# EAGLE board test_layout (EAGLE 6.5.0)
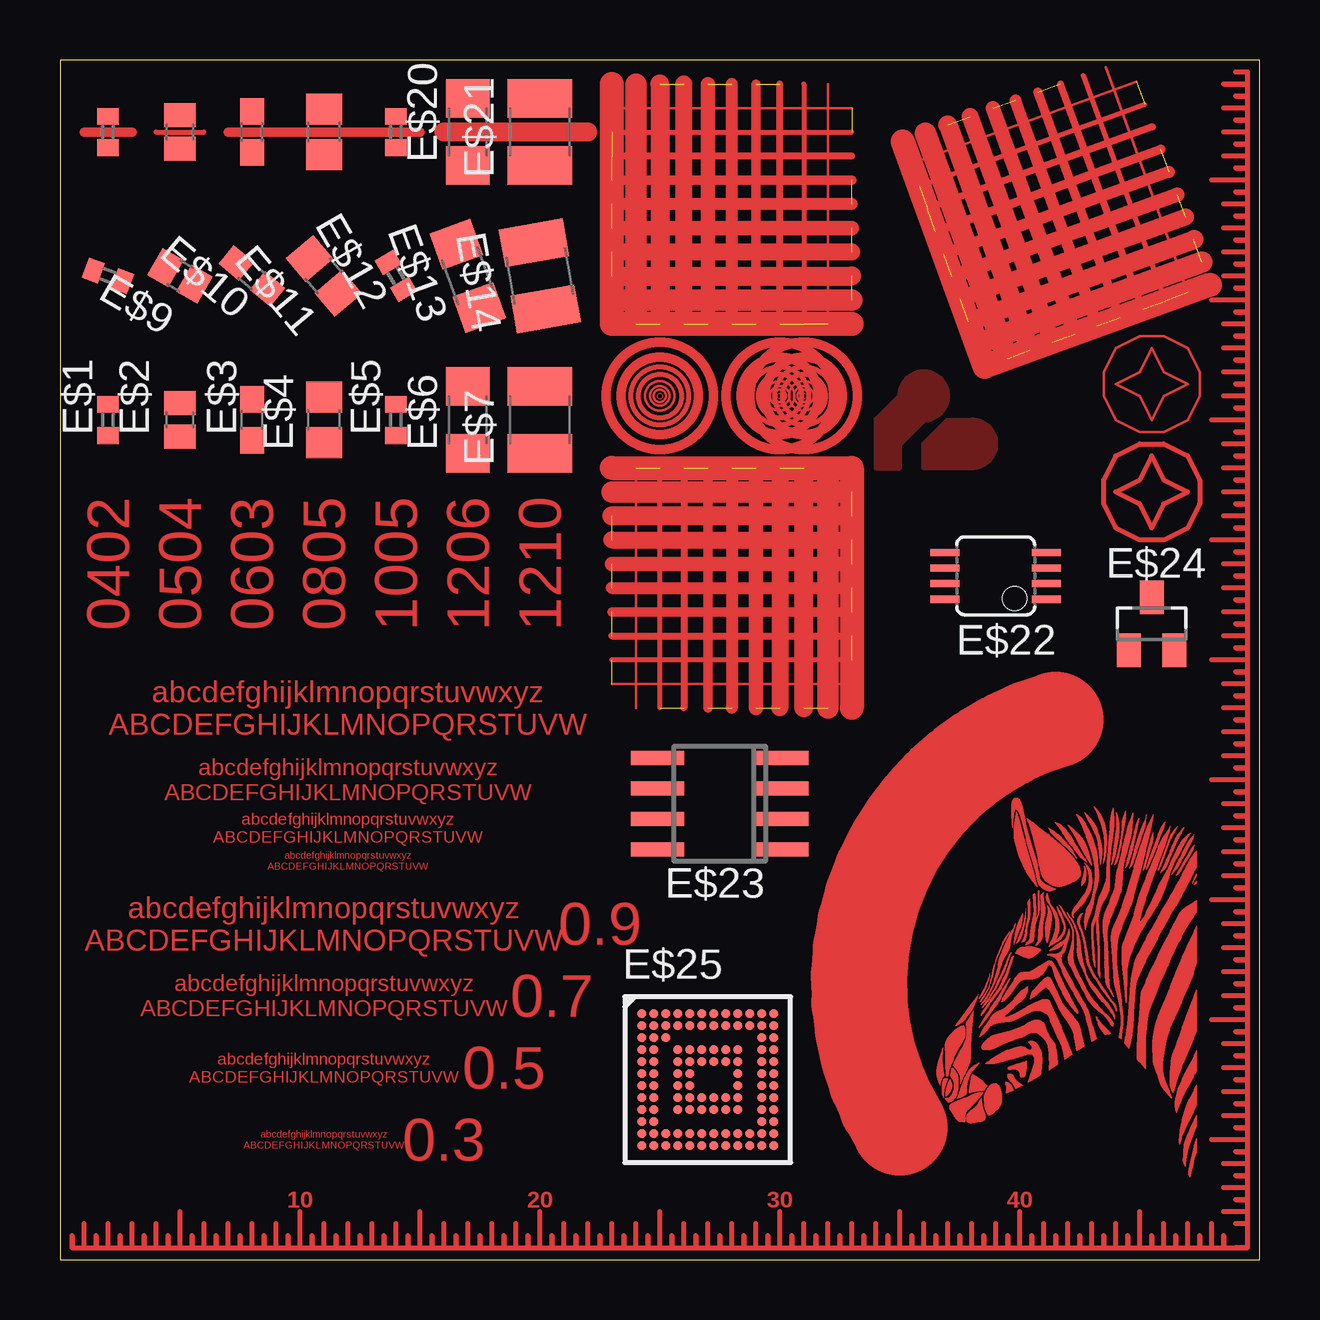
[diagram p0: board, top side]

Size 50 x 50 mm. Coordinates in mm from the lower left corner, seen from the top.
Outline: 0,0 50,0 50,50 0,50 0,0
Copper layers (1*16): Top 0.035mm / dielectric 1.5mm / Bottom 0.035mm
Design rules "default *": minimum track width 10mil, minimum drill 24mil, track to track 8mil, track to pad 8mil, pad to pad 8mil, via to via 8mil, smd to smd 8mil, copper to edge 0mil, drill to drill 0mil, minimum pad ring 10mil, minimum via ring 8mil, stop-mask expansion 4mil, vias tented up to drill 0mil, thermal gap 10mil

## Footprints (pad centres in the part's own frame; a part is rotated, then mirrored left to right if it is on the bottom)
C0402 = smd 0.7 x 0.9: 1 -0.65,0; 2 0.65,0
C0504 = smd 1 x 1.3: 1 -0.7,0; 2 0.7,0
C0603 = smd 1.1 x 1: 1 -0.85,0; 2 0.85,0
C0805 = smd 1.3 x 1.5: 1 -0.95,0; 2 0.95,0
C1005 = smd 0.7 x 0.9: 1 -0.65,0; 2 0.65,0
C1206 = smd 1.6 x 1.8: 1 -1.4,0; 2 1.4,0
C1210 = smd 1.6 x 2.7: 1 -1.4,0; 2 1.4,0
MSOP08 = smd 0.3 x 1.2: 1 -0.976,-2.113; 2 -0.326,-2.113; 3 0.324,-2.113; 4 0.974,-2.113; 5 0.974,2.112; 6 0.324,2.112; 7 -0.326,2.112; 8 -0.976,2.112
SO08 = smd 0.6 x 2.2: 1 -1.905,-2.6; 2 -0.635,-2.6; 3 0.635,-2.6; 4 1.905,-2.6; 5 1.905,2.6; 6 0.635,2.6; 7 -0.635,2.6; 8 -1.905,2.6
SOT23 = smd 1 x 1.4: 1 -0.95,-1.1; 2 0.95,-1.1; 3 0,1.1
S-PBGA-N113 = smd 0.35 x 0.35: A1 -2.75,2.75; A2 -2.25,2.75; A3 -1.75,2.75; A4 -1.25,2.75; A5 -0.75,2.75; A6 -0.25,2.75; A7 0.25,2.75; A8 0.75,2.75; A9 1.25,2.75; A10 1.75,2.75; A11 2.25,2.75; A12 2.75,2.75; B1 -2.75,2.25; B2 -2.25,2.25; B3 -1.75,2.25; B4 -1.25,2.25; B5 -0.75,2.25; B6 -0.25,2.25; B7 0.25,2.25; B8 0.75,2.25; B9 1.25,2.25; B10 1.75,2.25; B11 2.25,2.25; B12 2.75,2.25; C1 -2.75,1.75; C2 -2.25,1.75; C3 -1.75,1.75; C11 2.25,1.75; C12 2.75,1.75; D1 -2.75,1.25; D2 -2.25,1.25; D4 -1.25,1.25; D5 -0.75,1.25; D6 -0.25,1.25; D7 0.25,1.25; D8 0.75,1.25; D9 1.25,1.25; D11 2.25,1.25; D12 2.75,1.25; E1 -2.75,0.75; E2 -2.25,0.75; E4 -1.25,0.75; E5 -0.75,0.75; E6 -0.25,0.75; E7 0.25,0.75; E8 0.75,0.75; E9 1.25,0.75; E11 2.25,0.75; E12 2.75,0.75; F1 -2.75,0.25; F2 -2.25,0.25; F4 -1.25,0.25; F5 -0.75,0.25; F9 1.25,0.25; F11 2.25,0.25; F12 2.75,0.25; G1 -2.75,-0.25; G2 -2.25,-0.25; G4 -1.25,-0.25; G5 -0.75,-0.25; G9 1.25,-0.25; G11 2.25,-0.25; G12 2.75,-0.25; H1 -2.75,-0.75; H2 -2.25,-0.75; H4 -1.25,-0.75; H5 -0.75,-0.75; H6 -0.25,-0.75; H7 0.25,-0.75; H8 0.75,-0.75; H9 1.25,-0.75; H11 2.25,-0.75; H12 2.75,-0.75; J1 -2.75,-1.25; J2 -2.25,-1.25; J4 -1.25,-1.25; J5 -0.75,-1.25; J6 -0.25,-1.25; J7 0.25,-1.25; J8 0.75,-1.25; J9 1.25,-1.25; J11 2.25,-1.25; J12 2.75,-1.25; K1 -2.75,-1.75; K2 -2.25,-1.75; K11 2.25,-1.75; K12 2.75,-1.75; L1 -2.75,-2.25; L2 -2.25,-2.25; L3 -1.75,-2.25; L4 -1.25,-2.25; L5 -0.75,-2.25; L6 -0.25,-2.25; L7 0.25,-2.25; L8 0.75,-2.25; L9 1.25,-2.25; L10 1.75,-2.25; L11 2.25,-2.25; L12 2.75,-2.25; M1 -2.75,-2.75; M2 -2.25,-2.75; M3 -1.75,-2.75; M4 -1.25,-2.75; M5 -0.75,-2.75; M6 -0.25,-2.75; M7 0.25,-2.75; M8 0.75,-2.75; M9 1.25,-2.75; M10 1.75,-2.75; M11 2.25,-2.75; M12 2.75,-2.75

## Placement (x,y rotation side)
E$1  [C0402]  2,35 90 top
E$2  [C0504]  5,35 90 top
E$3  [C0603]  8,35 90 top
E$4  [C0805]  11,35 90 top
E$5  [C1005]  14,35 90 top
E$6  [C1206]  17,35 90 top
E$7  [C1210]  20,35 90 top
E$8  [C0402]  2,41 160 top
E$9  [C0504]  5,41 150 top
E$10  [C0603]  8,41 140 top
E$11  [C0805]  11,41 130 top
E$12  [C1005]  14,41 120 top
E$13  [C1206]  17,41 110 top
E$14  [C1210]  20,41 100 top
E$15  [C0402]  2,47 90 top
E$16  [C0504]  5,47 90 top
E$17  [C0603]  8,47 90 top
E$18  [C0805]  11,47 90 top
E$19  [C1005]  14,47 90 top
E$20  [C1206]  17,47 90 top
E$21  [C1210]  20,47 90 top
E$22  [MSOP08]  39,28.5 90 top
E$23  [SO08]  27.5,19 90 top
E$24  [SOT23]  45.5,26.5 0 top
E$25  [S-PBGA-N113]  27,7.5 0 top

## Library data of the parts
E$1-E$21 = rcl
E$22-E$24 = linear
E$25 = texas

## Tracks (layer width: path | path; a pad name or v marks a point on that pad's centre or on a via)
S$1
  Top 0.8: 22,47 16,47
S$2
  Top 0.4: 15,47 7,47
S$3
  Top 0.4: 1,47 3,47
S$4
  Top 0.2: 4,47 6,47
S$5
  Top 1: 23,39 23,49
S$6  (8 unrouted)
  Top 0.1: 32,39 32,49
  Top 0.2: 31,49 31,39
  Top 0.3: 30,39 30,49
  Top 0.4: 29,49 29,39
  Top 0.5: 28,39 28,49
  Top 0.6: 27,49 27,39
  Top 0.7: 26,39 26,49
  Top 0.8: 25,49 25,39
  Top 0.9: 24,39 24,49
S$7
  Top 1: 33,39 23,39
S$8  (8 unrouted)
  Top 0.1: 33,48 23,48
  Top 0.2: 23,47 33,47
  Top 0.3: 33,46 23,46
  Top 0.4: 23,45 33,45
  Top 0.5: 33,44 23,44
  Top 0.6: 23,43 33,43
  Top 0.7: 33,42 23,42
  Top 0.8: 23,41 33,41
  Top 0.9: 33,40 23,40
S$9
  Top 1: 33,33 33,23
S$10  (8 unrouted)
  Top 0.1: 24,33 24,23
  Top 0.2: 25,23 25,33
  Top 0.3: 26,33 26,23
  Top 0.4: 27,23 27,33
  Top 0.5: 28,33 28,23
  Top 0.6: 29,23 29,33
  Top 0.7: 30,33 30,23
  Top 0.8: 31,23 31,33
  Top 0.9: 32,33 32,23
S$11
  Top 1: 23,33 33,33
S$12  (8 unrouted)
  Top 0.1: 23,24 33,24
  Top 0.2: 33,25 23,25
  Top 0.3: 23,26 33,26
  Top 0.4: 33,27 23,27
  Top 0.5: 23,28 33,28
  Top 0.6: 33,29 23,29
  Top 0.7: 23,30 33,30
  Top 0.8: 33,31 23,31
  Top 0.9: 23,32 33,32
S$13
  Top 1: 38.55,37.22 35.13,46.61
S$14  (8 unrouted)
  Top 0.1: 47.01,40.29 43.59,49.69
  Top 0.2: 42.65,49.35 46.07,39.95
  Top 0.3: 45.13,39.61 41.71,49.01
  Top 0.4: 40.77,48.66 44.19,39.27
  Top 0.5: 43.25,38.92 39.83,48.32
  Top 0.6: 38.89,47.98 42.31,38.58
  Top 0.7: 41.37,38.24 37.95,47.64
  Top 0.8: 37.01,47.3 40.43,37.9
  Top 0.9: 39.49,37.56 36.07,46.95
S$15
  Top 1: 47.95,40.63 38.55,37.22
S$16  (8 unrouted)
  Top 0.1: 44.87,49.09 35.47,45.67
  Top 0.2: 35.81,44.73 45.21,48.15
  Top 0.3: 45.55,47.21 36.16,43.79
  Top 0.4: 36.5,42.85 45.89,46.27
  Top 0.5: 46.24,45.33 36.84,41.91
  Top 0.6: 37.18,40.97 46.58,44.39
  Top 0.7: 46.92,43.45 37.52,40.03
  Top 0.8: 37.87,39.09 47.26,42.52
  Top 0.9: 47.6,41.58 38.21,38.16
S$17
  Top 4: 41.5,22.5 arc105 35,5.5
S$18
  Top 0.2: 0.5,0.5 0.5,1 0.5,0.5 | 0.5,0.5 1,0.5 | 1,0.5 1,1.5 | 1,0.5 1.5,0.5
S$19
  Top 0.2: 1.5,0.5 1.5,1 1.5,0.5 | 1.5,0.5 2,0.5 | 2,0.5 2,1.5 | 2,0.5 2.5,0.5
S$20
  Top 0.2: 2.5,0.5 2.5,1 2.5,0.5 | 2.5,0.5 3,0.5 | 3,0.5 3,1.5 | 3,0.5 3.5,0.5
S$21
  pour Top: 36,33 36,34 37,35 38,35 arc-90 39,34 arc-90 38,33
S$22
  pour Top: 35,33 35,34 36,35 arc90 37,36 arc90 36,37 arc90 35,36 34,35 34,33
S$24
  Top 0.1: 43.5,37 44,38 45,38.5 46,38.5 47,38 47.5,37 47.5,36 47,35 46,34.5 45,34.5 44,35 43.5,36 43.5,37
S$25
  Top 0.1: 45,37 45.5,38 46,37 47,36.5 46,36 45.5,35 45,36 44,36.5 45,37
S$26
  Top 0.2: 43.5,32.5 44,33.5 45,34 46,34 47,33.5 47.5,32.5 47.5,31.5 47,30.5 46,30 45,30 44,30.5 43.5,31.5 43.5,32.5
S$27
  Top 0.2: 45,32.5 45.5,33.5 46,32.5 47,32 46,31.5 45.5,30.5 45,31.5 44,32 45,32.5
S$28
  Top 0.2: 3.5,0.5 3.5,1 3.5,0.5 | 3.5,0.5 4,0.5 | 4,0.5 4,1.5 | 4,0.5 4.5,0.5
S$29
  Top 0.2: 4.5,0.5 4.5,1 4.5,0.5 | 4.5,0.5 5,0.5 | 5,0.5 5,2 | 5,0.5 5.5,0.5
S$30
  Top 0.2: 5.5,0.5 5.5,1 5.5,0.5 | 5.5,0.5 6,0.5 | 6,0.5 6,1.5 | 6,0.5 6.5,0.5
S$31
  Top 0.2: 6.5,0.5 6.5,1 6.5,0.5 | 6.5,0.5 7,0.5 | 7,0.5 7,1.5 | 7,0.5 7.5,0.5
S$32
  Top 0.2: 7.5,0.5 7.5,1 7.5,0.5 | 7.5,0.5 8,0.5 | 8,0.5 8,1.5 | 8,0.5 8.5,0.5
S$33
  Top 0.2: 8.5,0.5 8.5,1 8.5,0.5 | 8.5,0.5 9,0.5 | 9,0.5 9,1.5 | 9,0.5 9.5,0.5
S$34
  Top 0.2: 9.5,0.5 9.5,1 9.5,0.5 | 9.5,0.5 10,0.5 | 10,0.5 10,2 | 10,0.5 10.5,0.5
S$35
  Top 0.2: 10.5,0.5 10.5,1 10.5,0.5 | 10.5,0.5 11,0.5 | 11,0.5 11,1.5 | 11,0.5 11.5,0.5
S$36
  Top 0.2: 11.5,0.5 11.5,1 11.5,0.5 | 11.5,0.5 12,0.5 | 12,0.5 12,1.5 | 12,0.5 12.5,0.5
S$37
  Top 0.2: 12.5,0.5 12.5,1 12.5,0.5 | 12.5,0.5 13,0.5 | 13,0.5 13,1.5 | 13,0.5 13.5,0.5
S$38
  Top 0.2: 13.5,0.5 13.5,1 13.5,0.5 | 13.5,0.5 14,0.5 | 14,0.5 14,1.5 | 14,0.5 14.5,0.5
S$39
  Top 0.2: 14.5,0.5 14.5,1 14.5,0.5 | 14.5,0.5 15,0.5 | 15,0.5 15,2 | 15,0.5 15.5,0.5
S$40
  Top 0.2: 15.5,0.5 15.5,1 15.5,0.5 | 15.5,0.5 16,0.5 | 16,0.5 16,1.5 | 16,0.5 16.5,0.5
S$41
  Top 0.2: 16.5,0.5 16.5,1 16.5,0.5 | 16.5,0.5 17,0.5 | 17,0.5 17,1.5 | 17,0.5 17.5,0.5
S$42
  Top 0.2: 17.5,0.5 17.5,1 17.5,0.5 | 17.5,0.5 18,0.5 | 18,0.5 18,1.5 | 18,0.5 18.5,0.5
S$43
  Top 0.2: 18.5,0.5 18.5,1 18.5,0.5 | 18.5,0.5 19,0.5 | 19,0.5 19,1.5 | 19,0.5 19.5,0.5
S$44
  Top 0.2: 19.5,0.5 19.5,1 19.5,0.5 | 19.5,0.5 20,0.5 | 20,0.5 20,2 | 20,0.5 20.5,0.5
S$45
  Top 0.2: 20.5,0.5 20.5,1 20.5,0.5 | 20.5,0.5 21,0.5 | 21,0.5 21,1.5 | 21,0.5 21.5,0.5
S$46
  Top 0.2: 21.5,0.5 21.5,1 21.5,0.5 | 21.5,0.5 22,0.5 | 22,0.5 22,1.5 | 22,0.5 22.5,0.5
S$47
  Top 0.2: 22.5,0.5 22.5,1 22.5,0.5 | 22.5,0.5 23,0.5 | 23,0.5 23,1.5 | 23,0.5 23.5,0.5
S$48
  Top 0.2: 23.5,0.5 23.5,1 23.5,0.5 | 23.5,0.5 24,0.5 | 24,0.5 24,1.5 | 24,0.5 24.5,0.5
S$49
  Top 0.2: 24.5,0.5 24.5,1 24.5,0.5 | 24.5,0.5 25,0.5 | 25,0.5 25,2 | 25,0.5 25.5,0.5
S$50
  Top 0.2: 25.5,0.5 25.5,1 25.5,0.5 | 25.5,0.5 26,0.5 | 26,0.5 26,1.5 | 26,0.5 26.5,0.5
S$51
  Top 0.2: 26.5,0.5 26.5,1 26.5,0.5 | 26.5,0.5 27,0.5 | 27,0.5 27,1.5 | 27,0.5 27.5,0.5
S$52
  Top 0.2: 27.5,0.5 27.5,1 27.5,0.5 | 27.5,0.5 28,0.5 | 28,0.5 28,1.5 | 28,0.5 28.5,0.5
S$53
  Top 0.2: 28.5,0.5 28.5,1 28.5,0.5 | 28.5,0.5 29,0.5 | 29,0.5 29,1.5 | 29,0.5 29.5,0.5
S$54
  Top 0.2: 29.5,0.5 29.5,1 29.5,0.5 | 29.5,0.5 30,0.5 | 30,0.5 30,2 | 30,0.5 30.5,0.5
S$55
  Top 0.2: 30.5,0.5 30.5,1 30.5,0.5 | 30.5,0.5 31,0.5 | 31,0.5 31,1.5 | 31,0.5 31.5,0.5
S$56
  Top 0.2: 31.5,0.5 31.5,1 31.5,0.5 | 31.5,0.5 32,0.5 | 32,0.5 32,1.5 | 32,0.5 32.5,0.5
S$57
  Top 0.2: 31,0.5 31.5,0.5
S$58
  Top 0.2: 31.5,0.5 31.5,1 31.5,0.5 | 31.5,0.5 32,0.5 | 32,0.5 32,1.5 | 32,0.5 32.5,0.5
S$59
  Top 0.2: 32.5,0.5 32.5,1 32.5,0.5 | 32.5,0.5 33,0.5 | 33,0.5 33,1.5 | 33,0.5 33.5,0.5
S$60
  Top 0.2: 33.5,0.5 33.5,1 33.5,0.5 | 33.5,0.5 34,0.5 | 34,0.5 34,1.5 | 34,0.5 34.5,0.5
S$61
  Top 0.2: 34.5,0.5 34.5,1 34.5,0.5 | 34.5,0.5 35,0.5 | 35,0.5 35,2 | 35,0.5 35.5,0.5
S$62
  Top 0.2: 35.5,0.5 35.5,1 35.5,0.5 | 35.5,0.5 36,0.5 | 36,0.5 36,1.5 | 36,0.5 36.5,0.5
S$63
  Top 0.2: 36.5,0.5 36.5,1 36.5,0.5 | 36.5,0.5 37,0.5 | 37,0.5 37,1.5 | 37,0.5 37.5,0.5
S$64
  Top 0.2: 37.5,0.5 37.5,1 37.5,0.5 | 37.5,0.5 38,0.5 | 38,0.5 38,1.5 | 38,0.5 38.5,0.5
S$65
  Top 0.2: 38.5,0.5 38.5,1 38.5,0.5 | 38.5,0.5 39,0.5 | 39,0.5 39,1.5 | 39,0.5 39.5,0.5
S$66
  Top 0.2: 39.5,0.5 39.5,1 39.5,0.5 | 39.5,0.5 40,0.5 | 40,0.5 40,2 | 40,0.5 40.5,0.5
S$67
  Top 0.2: 40.5,0.5 40.5,1 40.5,0.5 | 40.5,0.5 41,0.5 | 41,0.5 41,1.5 | 41,0.5 41.5,0.5
S$68
  Top 0.2: 41.5,0.5 41.5,1 41.5,0.5 | 41.5,0.5 42,0.5 | 42,0.5 42,1.5 | 42,0.5 42.5,0.5
S$69
  Top 0.2: 42.5,0.5 42.5,1 42.5,0.5 | 42.5,0.5 43,0.5 | 43,0.5 43,1.5 | 43,0.5 43.5,0.5
S$70
  Top 0.2: 43.5,0.5 43.5,1 43.5,0.5 | 43.5,0.5 44,0.5 | 44,0.5 44,1.5 | 44,0.5 44.5,0.5
S$71
  Top 0.2: 44.5,0.5 44.5,1 44.5,0.5 | 44.5,0.5 45,0.5 | 45,0.5 45,1.5 | 45,0.5 45.5,0.5
S$72
  Top 0.2: 44.5,0.5 45,0.5 | 45,0.5 45,2 | 45,0.5 45.5,0.5
S$73
  Top 0.2: 45.5,0.5 45.5,1 45.5,0.5 | 45.5,0.5 46,0.5 | 46,0.5 46,1.5 | 46,0.5 46.5,0.5
S$74
  Top 0.2: 46.5,0.5 46.5,1 46.5,0.5 | 46.5,0.5 47,0.5 | 47,0.5 47,1.5 | 47,0.5 47.5,0.5
S$75
  Top 0.2: 47.5,0.5 47.5,1 47.5,0.5 | 47.5,0.5 48,0.5 | 48,0.5 48,1.5 | 48,0.5 48.5,0.5 | 48.5,0.5 48.5,1 48.5,0.5 | 48.5,0.5 49,0.5 49.5,0.5 49.5,1
S$76
  Top 0.2: 49.5,0.5 49,0.5 49.5,0.5 | 49.5,0.5 49.5,1 49.5,1.5
S$77
  Top 0.2: 49,1.5 49.5,1.5 49.5,2 | 49.5,2 48.5,2 | 49.5,2 49.5,2.5
S$78
  Top 0.2: 49.5,2.5 49,2.5 49.5,2.5 | 49.5,2.5 49.5,3 | 49.5,3 48.5,3 | 49.5,3 49.5,3.5
S$79
  Top 0.2: 49.5,3.5 49,3.5 49.5,3.5 | 49.5,3.5 49.5,4 | 49.5,4 48.5,4 | 49.5,4 49.5,4.5
S$80
  Top 0.2: 49.5,4.5 49,4.5 49.5,4.5 | 49.5,4.5 49.5,5 | 49.5,5 48,5 | 49.5,5 49.5,5.5
S$81
  Top 0.2: 49.5,5.5 49,5.5 49.5,5.5 | 49.5,5.5 49.5,6 | 49.5,6 48.5,6 | 49.5,6 49.5,6.5
S$82
  Top 0.2: 49.5,6.5 49,6.5 49.5,6.5 | 49.5,6.5 49.5,7 | 49.5,7 48.5,7 | 49.5,7 49.5,7.5
S$83
  Top 0.2: 49.5,7.5 49,7.5 49.5,7.5 | 49.5,7.5 49.5,8 | 49.5,8 48.5,8 | 49.5,8 49.5,8.5
S$84
  Top 0.2: 49.5,8.5 49,8.5 49.5,8.5 | 49.5,8.5 49.5,9 | 49.5,9 48.5,9 | 49.5,9 49.5,9.5
S$85
  Top 0.2: 49.5,9.5 49,9.5 49.5,9.5 | 49.5,9.5 49.5,10 | 49.5,10 48,10 | 49.5,10 49.5,10.5
S$86
  Top 0.2: 49.5,10.5 49,10.5 49.5,10.5 | 49.5,10.5 49.5,11 | 49.5,11 48.5,11 | 49.5,11 49.5,11.5
S$87
  Top 0.2: 49.5,11.5 49,11.5 49.5,11.5 | 49.5,11.5 49.5,12 | 49.5,12 48.5,12 | 49.5,12 49.5,12.5
S$88
  Top 0.2: 49.5,12.5 49,12.5 49.5,12.5 | 49.5,12.5 49.5,13 | 49.5,13 48.5,13 | 49.5,13 49.5,13.5
S$89
  Top 0.2: 49.5,13.5 49,13.5 49.5,13.5 | 49.5,13.5 49.5,14 | 49.5,14 48.5,14 | 49.5,14 49.5,14.5
S$90
  Top 0.2: 49.5,14.5 49,14.5 49.5,14.5 | 49.5,14.5 49.5,15 | 49.5,15 48,15 | 49.5,15 49.5,15.5
S$91
  Top 0.2: 49.5,15.5 49,15.5 49.5,15.5 | 49.5,15.5 49.5,16 | 49.5,16 48.5,16 | 49.5,16 49.5,16.5
S$92
  Top 0.2: 49.5,16.5 49,16.5 49.5,16.5 | 49.5,16.5 49.5,17 | 49.5,17 48.5,17 | 49.5,17 49.5,17.5
S$93
  Top 0.2: 49.5,17.5 49,17.5 49.5,17.5 | 49.5,17.5 49.5,18 | 49.5,18 48.5,18 | 49.5,18 49.5,18.5
S$94
  Top 0.2: 49.5,18.5 49,18.5 49.5,18.5 | 49.5,18.5 49.5,19 | 49.5,19 48.5,19 | 49.5,19 49.5,19.5
S$95
  Top 0.2: 49.5,19.5 49,19.5 49.5,19.5 | 49.5,19.5 49.5,20 | 49.5,20 48,20 | 49.5,20 49.5,20.5
S$96
  Top 0.2: 49.5,20.5 49,20.5 49.5,20.5 | 49.5,20.5 49.5,21 | 49.5,21 48.5,21 | 49.5,21 49.5,21.5
S$97
  Top 0.2: 49.5,21.5 49,21.5 49.5,21.5 | 49.5,21.5 49.5,22 | 49.5,22 48.5,22 | 49.5,22 49.5,22.5
S$98
  Top 0.2: 49.5,22.5 49,22.5 49.5,22.5 | 49.5,22.5 49.5,23 | 49.5,23 48.5,23 | 49.5,23 49.5,23.5
S$99
  Top 0.2: 49.5,23.5 49,23.5 49.5,23.5 | 49.5,23.5 49.5,24 | 49.5,24 48.5,24 | 49.5,24 49.5,24.5
S$100
  Top 0.2: 49.5,24.5 49,24.5 49.5,24.5 | 49.5,24.5 49.5,25 | 49.5,25 48,25 | 49.5,25 49.5,25.5
S$101
  Top 0.2: 49.5,25.5 49,25.5 49.5,25.5 | 49.5,25.5 49.5,26 | 49.5,26 48.5,26 | 49.5,26 49.5,26.5
S$102
  Top 0.2: 49.5,26.5 49,26.5 49.5,26.5 | 49.5,26.5 49.5,27 | 49.5,27 48.5,27 | 49.5,27 49.5,27.5
S$103
  Top 0.2: 49.5,27.5 49,27.5 49.5,27.5 | 49.5,27.5 49.5,28 | 49.5,28 48.5,28 | 49.5,28 49.5,28.5
S$104
  Top 0.2: 49.5,28.5 49,28.5 49.5,28.5 | 49.5,28.5 49.5,29 | 49.5,29 48.5,29 | 49.5,29 49.5,29.5
S$105
  Top 0.2: 49.5,29.5 49,29.5 49.5,29.5 | 49.5,29.5 49.5,30 | 49.5,30 48,30 | 49.5,30 49.5,30.5
S$106
  Top 0.2: 49.5,30.5 49,30.5 49.5,30.5 | 49.5,30.5 49.5,31 | 49.5,31 48.5,31 | 49.5,31 49.5,31.5
S$107
  Top 0.2: 49.5,31.5 49,31.5 49.5,31.5 | 49.5,31.5 49.5,32 | 49.5,32 48.5,32 | 49.5,32 49.5,32.5
S$108
  Top 0.2: 49.5,31 49.5,31.5
S$109
  Top 0.2: 49.5,31.5 49,31.5 49.5,31.5 | 49.5,31.5 49.5,32 | 49.5,32 48.5,32 | 49.5,32 49.5,32.5
S$110
  Top 0.2: 49.5,32.5 49,32.5 49.5,32.5 | 49.5,32.5 49.5,33 | 49.5,33 48.5,33 | 49.5,33 49.5,33.5
S$111
  Top 0.2: 49.5,33.5 49,33.5 49.5,33.5 | 49.5,33.5 49.5,34 | 49.5,34 48.5,34 | 49.5,34 49.5,34.5
S$112
  Top 0.2: 49.5,34.5 49,34.5 49.5,34.5 | 49.5,34.5 49.5,35 | 49.5,35 48,35 | 49.5,35 49.5,35.5
S$113
  Top 0.2: 49.5,35.5 49,35.5 49.5,35.5 | 49.5,35.5 49.5,36 | 49.5,36 48.5,36 | 49.5,36 49.5,36.5
S$114
  Top 0.2: 49.5,36.5 49,36.5 49.5,36.5 | 49.5,36.5 49.5,37 | 49.5,37 48.5,37 | 49.5,37 49.5,37.5
S$115
  Top 0.2: 49.5,37.5 49,37.5 49.5,37.5 | 49.5,37.5 49.5,38 | 49.5,38 48.5,38 | 49.5,38 49.5,38.5
S$116
  Top 0.2: 49.5,38.5 49,38.5 49.5,38.5 | 49.5,38.5 49.5,39 | 49.5,39 48.5,39 | 49.5,39 49.5,39.5
S$117
  Top 0.2: 49.5,39.5 49,39.5 49.5,39.5 | 49.5,39.5 49.5,40 | 49.5,40 48,40 | 49.5,40 49.5,40.5
S$118
  Top 0.2: 49.5,40.5 49,40.5 49.5,40.5 | 49.5,40.5 49.5,41 | 49.5,41 48.5,41 | 49.5,41 49.5,41.5
S$119
  Top 0.2: 49.5,41.5 49,41.5 49.5,41.5 | 49.5,41.5 49.5,42 | 49.5,42 48.5,42 | 49.5,42 49.5,42.5
S$120
  Top 0.2: 49.5,42.5 49,42.5 49.5,42.5 | 49.5,42.5 49.5,43 | 49.5,43 48.5,43 | 49.5,43 49.5,43.5
S$121
  Top 0.2: 49.5,43.5 49,43.5 49.5,43.5 | 49.5,43.5 49.5,44 | 49.5,44 48.5,44 | 49.5,44 49.5,44.5
S$122
  Top 0.2: 49.5,44.5 49,44.5 49.5,44.5 | 49.5,44.5 49.5,45 | 49.5,45 48.5,45 | 49.5,45 49.5,45.5
S$123
  Top 0.2: 49.5,44.5 49.5,45 | 49.5,45 48,45 | 49.5,45 49.5,45.5
S$124
  Top 0.2: 49.5,45.5 49,45.5 49.5,45.5 | 49.5,45.5 49.5,46 | 49.5,46 48.5,46 | 49.5,46 49.5,46.5
S$125
  Top 0.2: 49.5,46.5 49,46.5 49.5,46.5 | 49.5,46.5 49.5,47 | 49.5,47 48.5,47 | 49.5,47 49.5,47.5
S$126
  Top 0.2: 49.5,47.5 49,47.5 49.5,47.5 | 49.5,47.5 49.5,48 | 49.5,48 48.5,48 | 49.5,48 49.5,48.5 | 49.5,48.5 49,48.5 49.5,48.5 | 49.5,48.5 49.5,49 | 49.5,49 48.5,49 49.5,49 | 49.5,49 49.5,49.5 49,49.5
(copper drawn outside any net)
  shapes: Top area x10310, Top circle x24

## Text on the board
Top: 0402 | 0504 | 0603 | 0805 | 1005 | 1206 | 1210 | abcdefghijklmnopqrstuvwxyz / ABCDEFGHIJKLMNOPQRSTUVW | abcdefghijklmnopqrstuvwxyz / ABCDEFGHIJKLMNOPQRSTUVW | abcdefghijklmnopqrstuvwxyz / ABCDEFGHIJKLMNOPQRSTUVW | abcdefghijklmnopqrstuvwxyz / ABCDEFGHIJKLMNOPQRSTUVW | abcdefghijklmnopqrstuvwxyz / ABCDEFGHIJKLMNOPQRSTUVW | 0.9 | abcdefghijklmnopqrstuvwxyz / ABCDEFGHIJKLMNOPQRSTUVW | 0.7 | abcdefghijklmnopqrstuvwxyz / ABCDEFGHIJKLMNOPQRSTUVW | 0.5 | abcdefghijklmnopqrstuvwxyz / ABCDEFGHIJKLMNOPQRSTUVW | 0.3 | 10 | 20 | 30 | 40